# EAGLE board PCB (EAGLE 9.7.0)
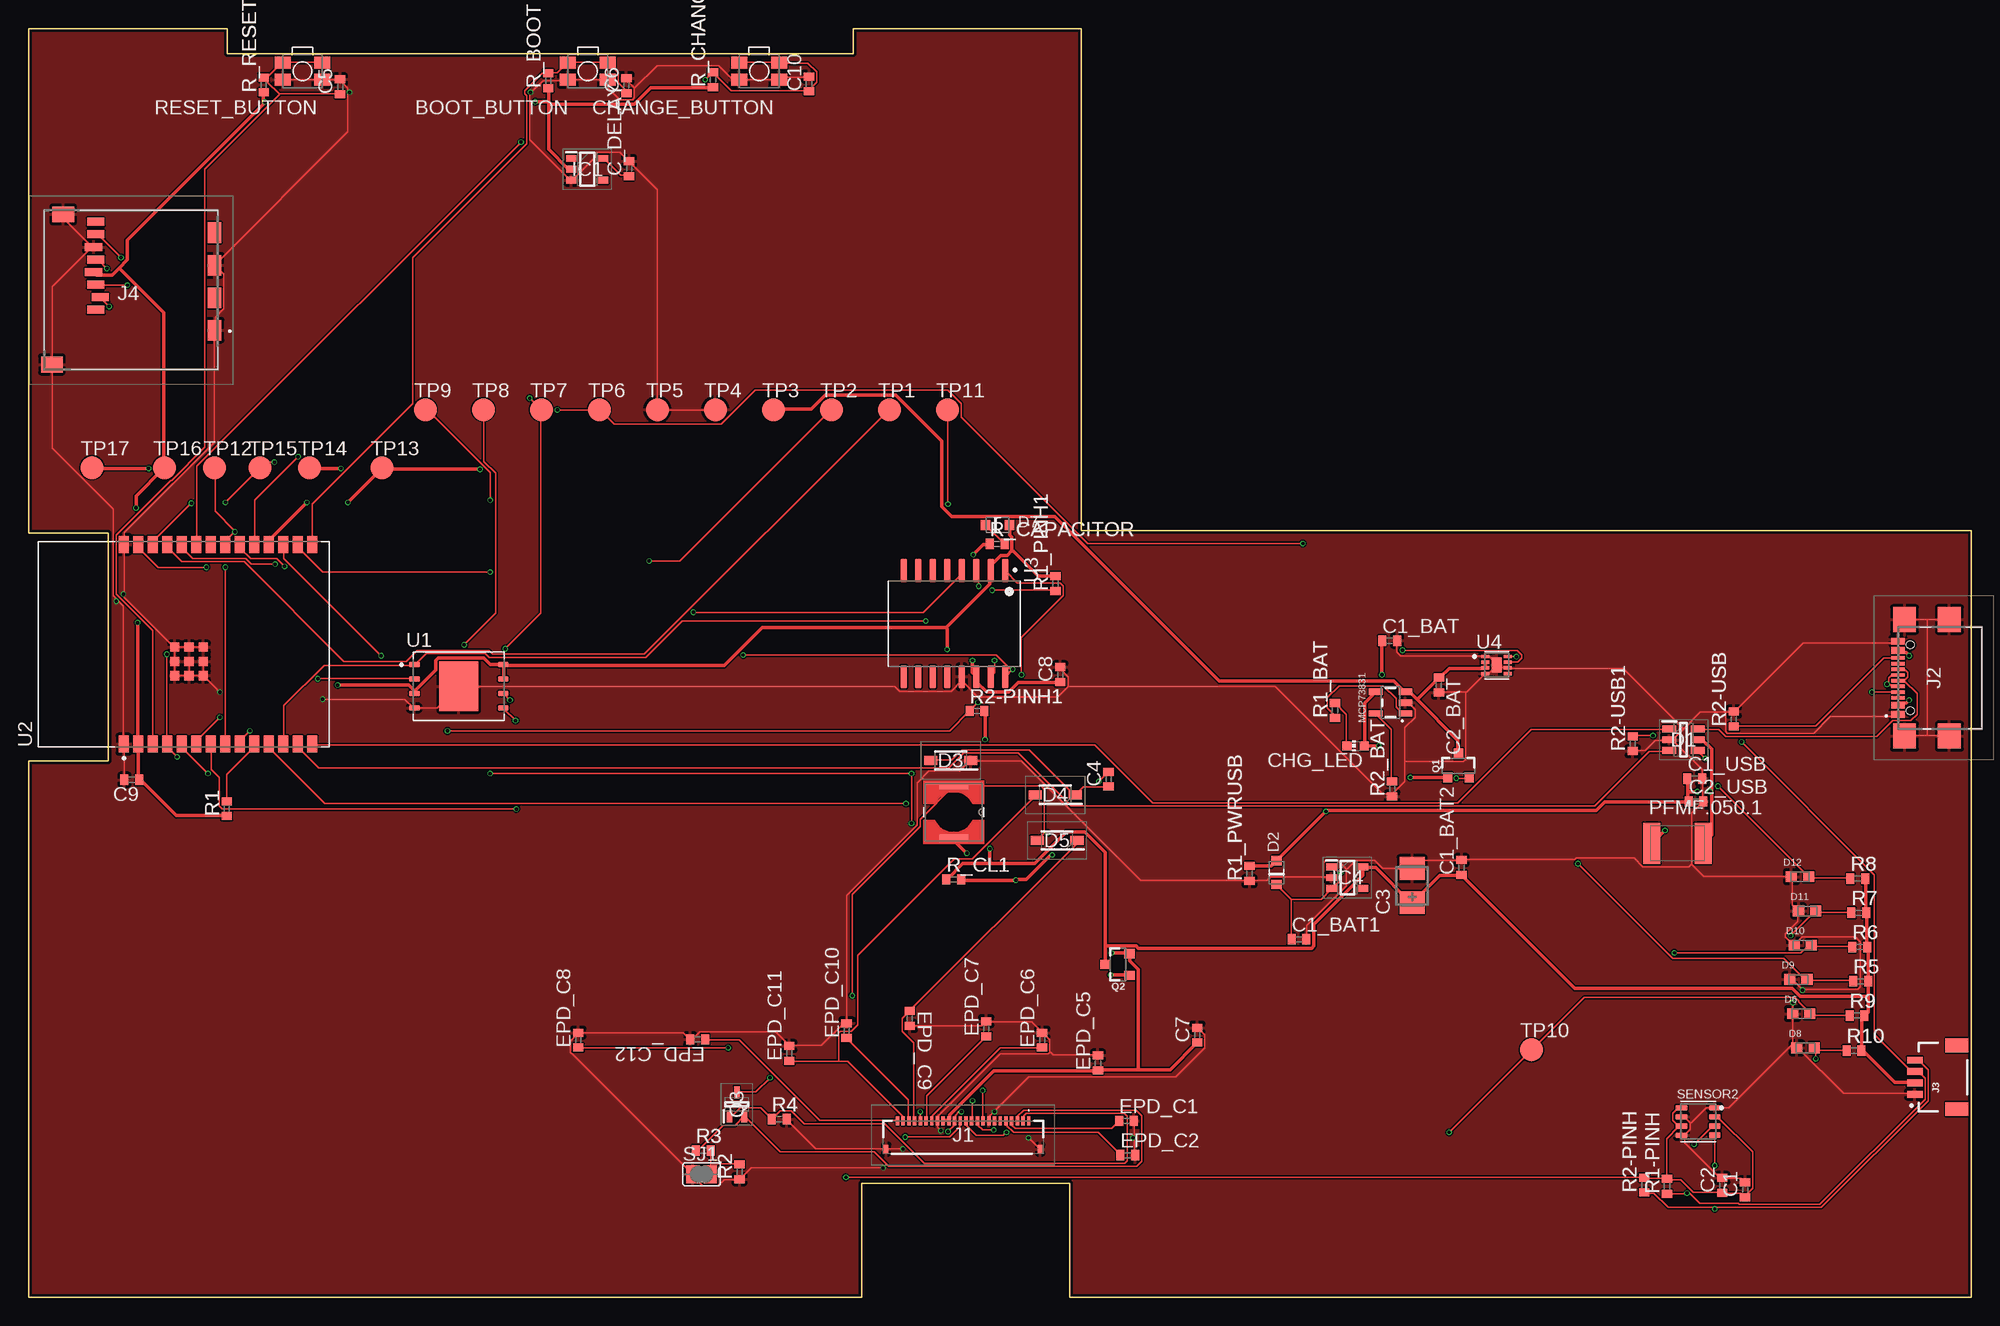
[diagram p0: board, top side]
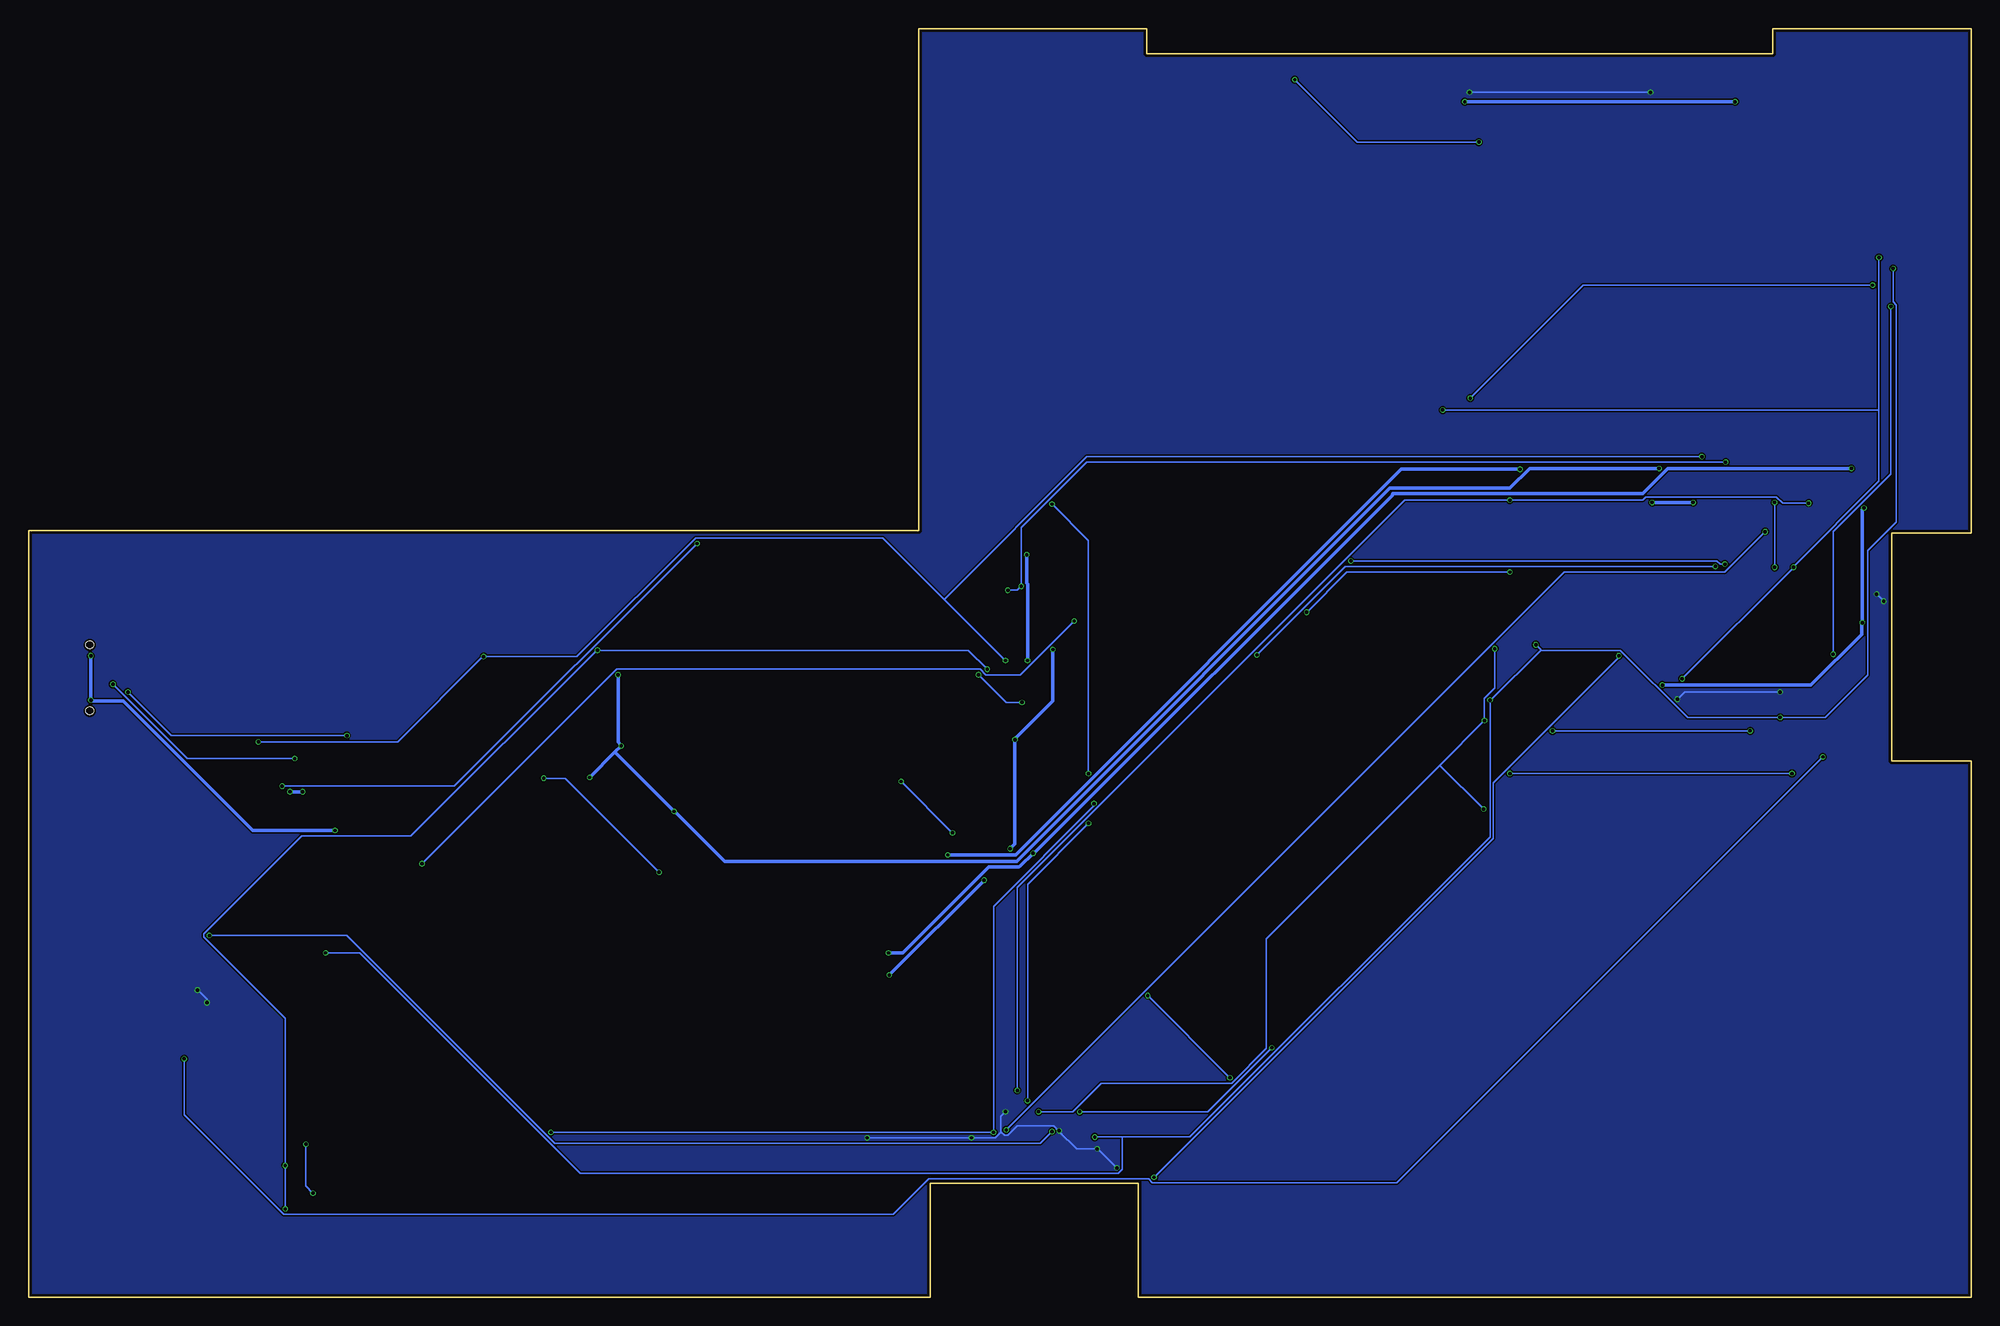
[diagram p1: board, bottom side, seen from below]

Size 170.2 x 111.2 mm. Coordinates in mm from the lower left corner, seen from the top.
Outline: 0,0 0,47 7,47 7,67 0,67 0,111.2 17.4,111.2 17.4,109 72.25,109 72.25,111.2 92.2,111.2 92.2,67.2 170.2,67.2 170.2,0 91.2,0 91.2,10 73,10 73,0 0,0
Copper layers (1*16): Top 0.035mm / dielectric 1.6mm / Bottom 0.035mm
Design rules "jlcpcb-2layers.dru": minimum track width 5mil, minimum drill 0.3mm, track to track 5mil, track to pad 5mil, pad to pad 5mil, via to via 5mil, smd to smd 5mil, copper to edge 0.2mm, drill to drill 6mil, minimum pad ring 10mil, minimum via ring 3mil, stop-mask expansion 4mil, vias tented up to drill 0mil, thermal gap 10mil
Net classes: 0 default: width 0.15 mm; 1 POWER: width 0.3 mm

## Footprints (pad centres in the part's own frame; a part is rotated, then mirrored left to right if it is on the bottom)
MYBUTTON = smd 1.4 x 1.05: 1 1.75,0.75; 2 -1.75,0.75; 3 -1.75,-0.75; 4 1.75,-0.75
ESP32_WROVER_EAGLE-LTSPICE_C0402 = smd 0.7 x 0.9: 1 -0.65,0; 2 0.65,0
RCL_CT3528 = smd 2 x 2.2: + -1.5,0; - 1.5,0
ADAFRUIT_CHIP-LED0603 = smd 0.8 x 0.8: A 0,-0.75; C 0,0.75
SOT95P280X145-6N = smd 1.2 x 0.6: 1 -1.25,0.95; 2 -1.25,0; 3 -1.25,-0.95; 4 1.25,-0.95; 5 1.25,0; 6 1.25,0.95
ESP32_WROVER_AVX---SD0805S020S1R0_AVX_SD0805S020S1R0_0 = smd 0.8 x 0.9: 1 -1.05,0; 2 1.05,0
SOD3716X135N = smd 1.15 x 0.8: 1 -1.75,0; 2 1.75,0
DIOC1608X36N = smd 0.97 x 0.94: 1 -0.75,0; 2 0.75,0
SOT95P280X125-5N = smd 0.9 x 0.6: 1 -1.4,0.95; 2 -1.4,0; 3 -1.4,-0.95; 4 1.4,-0.95; 5 1.4,0.95
SOT95P280X120-5N = smd 0.9 x 0.6: 1 -1.4,0.95; 2 -1.4,0; 3 -1.4,-0.95; 4 1.4,-0.95; 5 1.4,0.95
FH34SRJ24S05SH99 = smd 0.3 x 0.8: 1 5.75,1.45; 2 5.25,1.45; 3 4.75,1.45; 4 4.25,1.45; 5 3.75,1.45; 6 3.25,1.45; 7 2.75,1.45; 8 2.25,1.45; 9 1.75,1.45; 10 1.25,1.45; 11 0.75,1.45; 12 0.25,1.45; 13 -0.25,1.45; 14 -0.75,1.45; 15 -1.25,1.45; 16 -1.75,1.45; 17 -2.25,1.45; 18 -2.75,1.45; 19 -3.25,1.45; 20 -3.75,1.45; 21 -4.25,1.45; 22 -4.75,1.45; 23 -5.25,1.45; 24 -5.75,1.45 | smd 0.4 x 0.8: MP1 6.75,-1.05; MP2 -6.75,-1.05
SAMACSYS_PARTS_USB4110GFA = smd 0.3 x 1.15: A1 -3.35,3.678; A4 -2.55,3.678; A5 -1.25,3.678; A6 -0.25,3.678; A7 0.25,3.678; A8 1.25,3.678; A9 2.55,3.678; A12 3.35,3.678; B1 3.05,3.678; B4 2.25,3.678; B5 1.75,3.678; B6 0.75,3.678; B7 -0.75,3.678; B8 -1.75,3.678; B9 -2.25,3.678; B12 -3.05,3.678 | smd 2.18 x 2: MP1 -5.11,-0.827; MP2 5.11,-0.827; MP3 -5.11,3.103; MP4 5.11,3.103 | hole 0.65: -2.89,2.603; 2.89,2.603
JST04_1MM_RA = smd 0.6 x 1.35: 1 -1.5,0; 2 -0.5,0; 3 0.5,0; 4 1.5,0 | smd 1.2 x 2: NC1 2.8,-3.675; NC2 -2.8,-3.675
112ATAARR03ATTEND = smd 1.8 x 1.2: G1 10.6,10.4; G2 4.9,10.4; S1 7.75,10.4; S2 2.05,10.4 | smd 1.4 x 1.9: G3 13.6,-3.85; G4 0.45,-2.85 | smd 0.7 x 1.5: P1 8.8,0; P2 7.7,0.4; P3 6.6,0; P4 5.5,-0.2; P5 4.4,0; P6 3.3,-0.2; P7 2.2,0; P8 1.1,0
IND_4828-WE-TPC_WRE = smd 0.635 x 2.54: 1 -2.286,0; 2 2.286,0
ESP32_WROVER_SPARKFUN-IC-POWER_SOT23-5 = smd 0.55 x 1.2: 1 -0.95,-1.3; 2 0,-1.3; 3 0.95,-1.3; 4 0.95,1.3; 5 -0.95,1.3
ESP32C6_VARISTOR_CT/CN1812 = smd 1.5 x 3.6: 1 -2.25,0; 2 2.25,0
ESP32_WROVER_SPARKFUN-DISCRETESEMI_SOT23-3 = smd 0.8 x 0.9: 1 -0.95,-1; 2 0.95,-1; 3 0,1.1
SOT65P210X110-3N = smd 1.05 x 0.5: 1 -1.05,0.65; 2 -1.05,-0.65; 3 1.05,0
ESP32_WROVER_EAGLE-LTSPICE_R0402 = smd 0.7 x 0.9: 1 -0.65,0; 2 0.65,0
ESP32_WROVER_BME680_PSON80P300X300X100-8N = smd 1.016 x 0.5: 1 1.458,1.2; 2 1.458,0.4; 3 1.458,-0.4; 4 1.458,-1.2; 5 -1.458,-1.22; 6 -1.458,-0.4; 7 -1.458,0.4; 8 -1.458,1.2
SJ = smd 1.168 x 1.6: 1 -0.762,0; 2 0.762,0
TP20R = smd 2 x 2: TP 0,0
SON127P600X800X80-9N = smd 0.94 x 0.44: 1 -3.895,1.905; 2 -3.895,0.635; 3 -3.895,-0.635; 4 -3.895,-1.905; 5 3.895,-1.905; 6 3.895,-0.635; 7 3.895,0.635; 8 3.895,1.905 | smd 3.4 x 4.3: 9 0,0
XCVR_ESP32-C6-WROOM-1-N8 = smd 1.5 x 0.9: 1 -8.75,5.26; 2 -8.75,3.99; 3 -8.75,2.72; 4 -8.75,1.45; 5 -8.75,0.18; 6 -8.75,-1.09; 7 -8.75,-2.36; 8 -8.75,-3.63; 9 -8.75,-4.9; 10 -8.75,-6.17; 11 -8.75,-7.44; 12 -8.75,-8.71; 13 -8.75,-9.98; 14 -8.75,-11.25; 15 8.75,-11.25; 16 8.75,-9.98; 17 8.75,-8.71; 18 8.75,-7.44; 19 8.75,-6.17; 20 8.75,-4.9; 21 8.75,-3.63; 22 8.75,-2.36; 23 8.75,-1.09; 24 8.75,0.18; 25 8.75,1.45; 26 8.75,2.72; 27 8.75,3.99; 28 8.75,5.26 | smd 0.8 x 0.8: 29_1 -2.755,0.79; 29_2 -1.505,0.79; 29_3 -0.255,0.79; 29_4 -2.755,-0.46; 29_5 -1.505,-0.46; 29_6 -0.255,-0.46; 29_7 -2.755,-1.71; 29_8 -1.505,-1.71; 29_9 -0.255,-1.71
SOIC127P1032X265-16N = smd 2.05 x 0.59: 1 -4.655,4.445; 2 -4.655,3.175; 3 -4.655,1.905; 4 -4.655,0.635; 5 -4.655,-0.635; 6 -4.655,-1.905; 7 -4.655,-3.175; 8 -4.655,-4.445; 9 4.655,-4.445; 10 4.655,-3.175; 11 4.655,-1.905; 12 4.655,-0.635; 13 4.655,0.635; 14 4.655,1.905; 15 4.655,3.175; 16 4.655,4.445
SON50P200X200X80-9N = smd 0.76 x 0.27: 1 -0.985,0.75; 2 -0.985,0.25; 3 -0.985,-0.25; 4 -0.985,-0.75; 5 0.985,-0.75; 6 0.985,-0.25; 7 0.985,0.25; 8 0.985,0.75 | smd 0.9 x 1.3: 9 0,0

## Placement (x,y rotation side)
BOOT_BUTTON  BUTTON_CUSYOMV1  [MYBUTTON]  49,107.45 180 top
C1  100nF  [ESP32_WROVER_EAGLE-LTSPICE_C0402]  150.37,9.44 90 top
C1_BAT  4.7uF  [ESP32_WROVER_EAGLE-LTSPICE_C0402]  119.23,57.55 0 top
C1_BAT1  4.7uF  [ESP32_WROVER_EAGLE-LTSPICE_C0402]  111.29,31.39 0 top
C1_BAT2  4.7uF  [ESP32_WROVER_EAGLE-LTSPICE_C0402]  125.53,37.68 90 top
C1_USB  100nF  [ESP32_WROVER_EAGLE-LTSPICE_C0402]  145.96,45.47 0 top
C2  100nF  [ESP32_WROVER_EAGLE-LTSPICE_C0402]  148.37,9.82 90 top
C2_BAT  4.7uF  [ESP32_WROVER_EAGLE-LTSPICE_C0402]  123.55,53.66 270 top
C2_USB  4.7uF  [ESP32_WROVER_EAGLE-LTSPICE_C0402]  146.07,43.47 0 top
C3  100uF  [RCL_CT3528]  121.2,36.09 90 top
C4  4.7uF/25V  [ESP32_WROVER_EAGLE-LTSPICE_C0402]  94.61,45.41 90 top
C5  1uF  [ESP32_WROVER_EAGLE-LTSPICE_C0402]  27.29,106.09 90 top
C6  100nF  [ESP32_WROVER_EAGLE-LTSPICE_C0402]  52.37,106.2 90 top
C7  10uF  [ESP32_WROVER_EAGLE-LTSPICE_C0402]  102.37,22.99 90 top
C8  100nF  [ESP32_WROVER_EAGLE-LTSPICE_C0402]  90.37,54.58 90 top
C9  100nF  [ESP32_WROVER_EAGLE-LTSPICE_C0402]  9.04,45.37 180 top
C10  100nF  [ESP32_WROVER_EAGLE-LTSPICE_C0402]  68.37,106.34 90 top
C_DELAY  100nF  [ESP32_WROVER_EAGLE-LTSPICE_C0402]  52.61,98.93 90 top
CHANGE_BUTTON  BUTTON_CUSYOMV1  [MYBUTTON]  64,107.45 180 top
CHG_LED  [ADAFRUIT_CHIP-LED0603]  116.25,48.34 90 top
D1  USBLC6-2SC6Y  [SOT95P280X145-6N]  144.98,48.87 0 top
D2  ESP32_WROVER_AVX---SD0805S020S1R0_AVX_SD0805S020S1R0_0_0AVX_SD0805S020S1R0_0_0  [ESP32_WROVER_AVX---SD0805S020S1R0_AVX_SD0805S020S1R0_0]  109.32,37.23 90 top
D3  MBR0530  [SOD3716X135N]  80.78,47.05 180 top
D4  MBR0530  [SOD3716X135N]  89.94,44.05 180 top
D5  MBR0530  [SOD3716X135N]  90.1,40.05 180 top
D6  PGB1010603MR  [DIOC1608X36N]  155.28,24.87 0 top
D7  ESP32_WROVER_AVX---SD0805S020S1R0_AVX_SD0805S020S1R0_0_0AVX_SD0805S020S1R0_0_0  [ESP32_WROVER_AVX---SD0805S020S1R0_AVX_SD0805S020S1R0_0]  84.88,67.68 0 top
D8  PGB1010603MR  [DIOC1608X36N]  155.66,21.87 0 top
D9  PGB1010603MR  [DIOC1608X36N]  155.04,27.87 0 top
D10  PGB1010603MR  [DIOC1608X36N]  155.42,30.87 0 top
D11  PGB1010603MR  [DIOC1608X36N]  155.8,33.87 0 top
D12  PGB1010603MR  [DIOC1608X36N]  155.18,36.87 0 top
EPD_C1  1uF/50V  [ESP32_WROVER_EAGLE-LTSPICE_C0402]  96.18,15.47 0 top
EPD_C2  1uF/50V  [ESP32_WROVER_EAGLE-LTSPICE_C0402]  96.29,12.47 0 top
EPD_C5  1uF/50V  [ESP32_WROVER_EAGLE-LTSPICE_C0402]  93.68,20.55 90 top
EPD_C6  1uF/50V  [ESP32_WROVER_EAGLE-LTSPICE_C0402]  88.79,22.55 90 top
EPD_C7  1uF/50V  [ESP32_WROVER_EAGLE-LTSPICE_C0402]  83.9,23.55 90 top
EPD_C8  1uF/50V  [ESP32_WROVER_EAGLE-LTSPICE_C0402]  48.15,22.55 90 top
EPD_C9  1uF/50V  [ESP32_WROVER_EAGLE-LTSPICE_C0402]  77.2,24.45 270 top
EPD_C10  1uF/50V  [ESP32_WROVER_EAGLE-LTSPICE_C0402]  71.66,23.39 90 top
EPD_C11  1uF/50V  [ESP32_WROVER_EAGLE-LTSPICE_C0402]  66.64,21.39 90 top
EPD_C12  1uF/50V  [ESP32_WROVER_EAGLE-LTSPICE_C0402]  58.61,22.61 180 top
IC1  BD5229G-TR  [SOT95P280X125-5N]  48.95,98.87 0 top
IC4  XC6220A331MR-G  [SOT95P280X120-5N]  115.53,36.79 0 top
J1  FH34SRJ-24S-0.5SH_99_  [FH34SRJ24S05SH99]  81.87,14.04 0 top
J2  SAMACSYS_PARTS_USB4110-GF-A  [SAMACSYS_PARTS_USB4110GFA]  167.44,54.3 90 top
J3  QWIIC_RIGHT_ANGLE  [JST04_1MM_RA]  165.25,19.3 90 top
J4  112A-TAAR-R03_ATTEND  [112ATAARR03ATTEND]  5.89,95.36 270 top
L1  68uH  [IND_4828-WE-TPC_WRE]  81.05,42.53 270 top
MCP73831  ESP32_WROVER_SPARKFUN-IC-POWER_MCP73831  [ESP32_WROVER_SPARKFUN-IC-POWER_SOT23-5]  119.31,52.12 90 top
PFMF.050.1  ESP32C6_VARISTORCN1812  [ESP32C6_VARISTOR_CT/CN1812]  144.44,39.8 0 top
Q1  20V/4.2A/52mΩ/1.4W  [ESP32_WROVER_SPARKFUN-DISCRETESEMI_SOT23-3]  125.26,46.56 0 top
Q2  20V/4.2A/52mΩ/1.4W  [ESP32_WROVER_SPARKFUN-DISCRETESEMI_SOT23-3]  95.44,29.18 90 top
Q3  SI1308EDL-T1-GE3  [SOT65P210X110-3N]  62.05,16.93 90 top
R1  10K  [ESP32_WROVER_EAGLE-LTSPICE_R0402]  17.37,42.83 90 top
R1-PINH  10K  [ESP32_WROVER_EAGLE-LTSPICE_R0402]  143.53,9.74 90 top
R1_BAT  200  [ESP32_WROVER_EAGLE-LTSPICE_R0402]  114.45,51.45 90 top
R1_PINH1  10K  [ESP32_WROVER_EAGLE-LTSPICE_R0402]  89.96,62.56 90 top
R1_PWRUSB  100K  [ESP32_WROVER_EAGLE-LTSPICE_R0402]  106.96,37.15 90 top
R2  2.2  [ESP32_WROVER_EAGLE-LTSPICE_R0402]  62.29,11.01 90 top
R2-PINH  10K  [ESP32_WROVER_EAGLE-LTSPICE_R0402]  141.53,9.85 90 top
R2-PINH1  10K  [ESP32_WROVER_EAGLE-LTSPICE_R0402]  83.09,51.39 0 top
R2-USB  5k1  [ESP32_WROVER_EAGLE-LTSPICE_R0402]  149.37,50.68 90 top
R2-USB1  5k1  [ESP32_WROVER_EAGLE-LTSPICE_R0402]  140.53,48.52 90 top
R2_BAT  2K  [ESP32_WROVER_EAGLE-LTSPICE_R0402]  119.45,44.56 90 top
R3  0.47  [ESP32_WROVER_EAGLE-LTSPICE_R0402]  59.1,12.87 0 top
R4  10K  [ESP32_WROVER_EAGLE-LTSPICE_R0402]  65.75,15.63 0 top
R5  10K  [ESP32_WROVER_EAGLE-LTSPICE_R0402]  160.49,27.71 0 top
R6  10K  [ESP32_WROVER_EAGLE-LTSPICE_R0402]  160.41,30.71 0 top
R7  10K  [ESP32_WROVER_EAGLE-LTSPICE_R0402]  160.33,33.71 0 top
R8  10K  [ESP32_WROVER_EAGLE-LTSPICE_R0402]  160.25,36.71 0 top
R9  10K  [ESP32_WROVER_EAGLE-LTSPICE_R0402]  160.17,24.71 0 top
R10  10K  [ESP32_WROVER_EAGLE-LTSPICE_R0402]  159.91,21.63 0 top
R_BOOT  10K  [ESP32_WROVER_EAGLE-LTSPICE_R0402]  45.53,106.63 90 top
R_CAPACITOR  15  [ESP32_WROVER_EAGLE-LTSPICE_R0402]  84.85,66.04 0 top
R_CHANGE  10K  [ESP32_WROVER_EAGLE-LTSPICE_R0402]  59.96,106.72 90 top
R_CL1  10K  [ESP32_WROVER_EAGLE-LTSPICE_R0402]  81.06,36.63 0 top
R_RESET  10K  [ESP32_WROVER_EAGLE-LTSPICE_R0402]  20.61,106.25 90 top
RESET_BUTTON  BUTTON_CUSYOMV1  [MYBUTTON]  24,107.45 180 top
SENSOR2  ESP32_WROVER_BME680_BME680  [ESP32_WROVER_BME680_PSON80P300X300X100-8N]  146.25,15.42 0 top
SJ1  0  [SJ]  58.96,10.79 0 top
TP1  TPTP20R  [TP20R]  75.41,77.79 0 top
TP2  TPTP20R  [TP20R]  70.33,77.79 0 top
TP3  TPTP20R  [TP20R]  65.25,77.79 0 top
TP4  TPTP20R  [TP20R]  60.17,77.79 0 top
TP5  TPTP20R  [TP20R]  55.09,77.79 0 top
TP6  TPTP20R  [TP20R]  50.01,77.79 0 top
TP7  TPTP20R  [TP20R]  44.93,77.79 0 top
TP8  TPTP20R  [TP20R]  39.85,77.79 0 top
TP9  TPTP20R  [TP20R]  34.77,77.79 0 top
TP10  TPTP20R  [TP20R]  131.66,21.71 0 top
TP11  TPTP20R  [TP20R]  80.49,77.79 0 top
TP12  TPTP20R  [TP20R]  16.31,72.71 0 top
TP13  TPTP20R  [TP20R]  30.96,72.71 0 top
TP14  TPTP20R  [TP20R]  24.61,72.71 0 top
TP15  TPTP20R  [TP20R]  20.26,72.71 0 top
TP16  TPTP20R  [TP20R]  11.91,72.71 0 top
TP17  TPTP20R  [TP20R]  5.56,72.71 0 top
U1  W25Q512JVEIQ  [SON127P600X800X80-9N]  37.69,53.56 0 top
U2  ESP32-C6-WROOM-1-N8  [XCVR_ESP32-C6-WROOM-1-N8]  13.6,57.24 90 top
U3  DS3231SN#  [SOIC127P1032X265-16N]  81.1,59.05 270 top
U4  MAX17048G+T10  [SON50P200X200X80-9N]  128.61,55.42 0 top

## Library data of the parts
BOOT_BUTTON CHANGE_BUTTON CHG_LED PFMF.050.1 RESET_BUTTON SJ1 TP1-TP17 = DeskAssistant v19 v1
C1 C1_BAT C1_BAT1 C1_BAT2 C1_USB C2 C2_BAT C2_USB C4-C10 C_DELAY EPD_C1 EPD_C2 EPD_C5-EPD_C12 = DeskAssistant v19 v1; SPICEMODEL: NONE; SPICEPREFIX: C
C3 = DeskAssistant v19 v1; SPICEPREFIX: C
D1 = DeskAssistant v19 v1; AVAILABILITY: In Stock; CHECK_PRICES: https://www.snapeda.com/parts/USBLC6-2SC6Y/STMicroelectronics/view-part/?ref=eda; DESCRIPTION: 17V Clamp 5A (8/20µs) Ipp Tvs Diode Surface Mount SOT-23-6; MF: STMicroelectronics; MP: USBLC6-2SC6Y; PACKAGE: SOT-23-6 STMicroelectronics; PRICE: None; SNAPEDA_LINK: https://www.snapeda.com/parts/USBLC6-2SC6Y/STMicroelectronics/view-part/?ref=snap
D2 D7 = DeskAssistant v19 v1; CENTROID_NOT_SPECIFIED: No; DATASHEET: http://datasheets.avx.com/schottky.pdf; DIGIKEY_DESCRIPTION: DIODE SCHOTTKY 20V 1A 0805; DIGIKEY_PART_NUMBER: 478-7800-1-ND; LEAD_FREE: yes; MF: AVX; MOUSER_PART_NUMBER: 581-SD0805S020S1R0; PACKAGE: 0805 (2012 metric); PREFIX: D; ROHS: yes; TEMPERATURE_RANGE_HIGH: +125°C; TEMPERATURE_RANGE_LOW: -55°C
D3-D5 = DeskAssistant v19 v1; AVAILABILITY: In Stock; CHECK_PRICES: https://www.snapeda.com/parts/MBR0530/Onsemi/view-part/?ref=eda; DESCRIPTION: Diode Schottky 30 V 500mA Surface Mount SOD-123; MF: ON Semiconductor; MP: MBR0530; PACKAGE: SOD-123-2 ON Semiconductor; PRICE: None; PURCHASE-URL: https://www.snapeda.com/api/url_track_click_mouser/?unipart_id=179458&manufacturer=ON Semiconductor&part_name=MBR0530&search_term=None; SNAPEDA_LINK: https://www.snapeda.com/parts/MBR0530/Onsemi/view-part/?ref=snap
D6 D8-D12 = DeskAssistant v19 v1; AVAILABILITY: In Stock; CHECK_PRICES: https://www.snapeda.com/parts/PGB1010603MR/Littelfuse/view-part/?ref=eda; DESCRIPTION: 150V (Typ) Clamp - Ipp Tvs Diode Surface Mount 0603 (1608 Metric); MF: Littelfuse Inc.; MP: PGB1010603MR; PACKAGE: 0603 Littelfuse Inc.; PRICE: None; PURCHASE-URL: https://www.snapeda.com/api/url_track_click_mouser/?unipart_id=5659453&manufacturer=Littelfuse Inc.&part_name=PGB1010603MR&search_term=None; SNAPEDA_LINK: https://www.snapeda.com/parts/PGB1010603MR/Littelfuse/view-part/?ref=snap
IC1 = DeskAssistant v19 v1; DESCRIPTION: Voltage Detector with Adjustable Delay Time: CMOS processes are utilized to develop high precision, low current consumption CMOS reset ICs that allow arbitrary setting of the delay time. The extensive lineup includes both Nch Open Drain and CMOS output types in a wide range of detection voltages (from 2.3V to 6.0V, in 0.1V steps), enabling selection of the ideal solution based on customer requirements. In addition, the entire series is of course both lead-free and RoHS-compliant.; HEIGHT: 1.25mm; MANUFACTURER_NAME: ROHM Semiconductor; MANUFACTURER_PART_NUMBER: BD5229G-TR; MOUSER_PART_NUMBER: 755-BD5229G-TR; MOUSER_PRICE-STOCK: https://www.mouser.co.uk/ProductDetail/ROHM-Semiconductor/BD5229G-TR?qs=4kLU8WoGk0vvnhrrYwdszw%3D%3D
IC4 = DeskAssistant v19 v1; DESCRIPTION: LDO Voltage Regulators; HEIGHT: 1.2mm; MANUFACTURER_NAME: Torex; MANUFACTURER_PART_NUMBER: XC6220A331MR-G; MOUSER_PART_NUMBER: 865-XC6220A331MR-G; MOUSER_PRICE-STOCK: https://www.mouser.co.uk/ProductDetail/Torex-Semiconductor/XC6220A331MR-G?qs=AsjdqWjXhJ8ZSWznL1J0gg%3D%3D
J1 = DeskAssistant v19 v1; DESCRIPTION: 24 Position FFC, FPC Connector Contacts, Top and Bottom 0.020" (0.50mm) Surface Mount, Right Angle; HEIGHT: 1.1mm; MANUFACTURER_NAME: Hirose; MANUFACTURER_PART_NUMBER: FH34SRJ-24S-0.5SH(99); MOUSER_PART_NUMBER: 798-FH34SRJ24S05SH99; MOUSER_PRICE-STOCK: https://www.mouser.co.uk/ProductDetail/Hirose-Connector/FH34SRJ-24S-0.5SH99?qs=vcbW%252B4%252BSTIpKBl5ap9J8Fw%3D%3D
J2 = DeskAssistant v19 v1; DESCRIPTION: CONN USB 2.0 TYPE-C R/A SMT; HEIGHT: 3.26mm; MANUFACTURER_NAME: GCT (GLOBAL CONNECTOR TECHNOLOGY); MANUFACTURER_PART_NUMBER: USB4110-GF-A; MOUSER_PART_NUMBER: 640-USB4110-GF-A; MOUSER_PRICE-STOCK: https://www.mouser.co.uk/ProductDetail/GCT/USB4110-GF-A?qs=KUoIvG%2F9IlYiZvIXQjyJeA%3D%3D
J3 = DeskAssistant v19 v1; PROD_ID: CONN-13694
J4 = DeskAssistant v19 v1; DESCRIPTION: Micro SD Card Socket, Push-Push Type, Top Mount, SMT, H=1.83mm, 10u; HEIGHT: 1.9mm; MANUFACTURER_NAME: ATTEND; MANUFACTURER_PART_NUMBER: 112A-TAAR-R03 ATTEND
L1 = DeskAssistant v19 v1; COPYRIGHT: Copyright (C) 2024 Ultra Librarian. All rights reserved.; MANUFACTURER_PART_NUMBER: 744043680; MFR_NAME: Wurth Electronics
MCP73831 = DeskAssistant v19 v1; PROD_ID: IC-09995
Q1 Q2 = DeskAssistant v19 v1; PROD_ID: TRAN-14388
Q3 = DeskAssistant v19 v1; AVAILABILITY: In Stock; CHECK_PRICES: https://www.snapeda.com/parts/SI1308EDL-T1-GE3/Vishay+Siliconix/view-part/?ref=eda; DESCRIPTION: Si1308EDL-T1-GE3 N-channel MOSFET Transistor, 1.5 A, 30 V, 3-Pin SC-70 | Siliconix / Vishay SI1308EDL-T1-GE3; MF: Vishay Siliconix; MP: SI1308EDL-T1-GE3; PACKAGE: SOT-323 Vishay Semiconductor; PRICE: None; PURCHASE-URL: https://www.snapeda.com/api/url_track_click_mouser/?unipart_id=274603&manufacturer=Vishay Siliconix&part_name=SI1308EDL-T1-GE3&search_term=None; SNAPEDA_LINK: https://www.snapeda.com/parts/SI1308EDL-T1-GE3/Vishay+Siliconix/view-part/?ref=snap
R1 R1-PINH R1_BAT R1_PINH1 R1_PWRUSB R2 R2-PINH R2-PINH1 R2-USB R2-USB1 R2_BAT R3-R10 R_BOOT R_CAPACITOR R_CHANGE R_CL1 R_RESET = DeskAssistant v19 v1; SPICEMODEL: NONE; SPICEPREFIX: R
SENSOR2 = DeskAssistant v19 v1; AVAILABILITY: Unavailable; DESCRIPTION: Integrated Environmental Unit; MF: Bosch Sensortec; MP: BME680; PACKAGE: LGA-8 Bosch Tools; PRICE: None
U1 = DeskAssistant v19 v1; AVAILABILITY: In Stock; CHECK_PRICES: https://www.snapeda.com/parts/W25Q512JVEIQ/Winbond+Electronics/view-part/?ref=eda; DESCRIPTION: FLASH - NOR Memory IC 512Mb (64M x 8) SPI - Quad I/O 133 MHz 8-WSON (8x6); MF: Winbond Electronics; MP: W25Q512JVEIQ; PACKAGE: Package; PRICE: None; SNAPEDA_LINK: https://www.snapeda.com/parts/W25Q512JVEIQ/Winbond+Electronics/view-part/?ref=snap
U2 = DeskAssistant v19 v1; AVAILABILITY: In Stock; CHECK_PRICES: https://www.snapeda.com/parts/ESP32-C6-WROOM-1-N8/Espressif+Systems/view-part/?ref=eda; DESCRIPTION: Multiprotocol Modules ESP32-C6 module, Wi-Fi 6 in 2.4 GHz band, Bluetooth 5, Zigbee 3.0 and Thread. ESP34-WROOM Compatible - ENGINEERING SAMPLE; MF: Espressif Systems; MP: ESP32-C6-WROOM-1-N8; PACKAGE: None; PRICE: None; SNAPEDA_LINK: https://www.snapeda.com/parts/ESP32-C6-WROOM-1-N8/Espressif+Systems/view-part/?ref=snap
U3 = DeskAssistant v19 v1; AVAILABILITY: In Stock; CHECK_PRICES: https://www.snapeda.com/parts/DS3231SN%23/Analog+Devices/view-part/?ref=eda; DESCRIPTION: Extremely Accurate I²C-Integrated RTC/TCXO/Crystal; MF: Analog Devices; MP: DS3231SN#; PACKAGE: SOIC-16 Maxim; PRICE: None; PURCHASE-URL: https://www.snapeda.com/api/url_track_click_mouser/?unipart_id=99048&manufacturer=Analog Devices&part_name=DS3231SN#&search_term=None; SNAPEDA_LINK: https://www.snapeda.com/parts/DS3231SN%23/Analog+Devices/view-part/?ref=snap
U4 = DeskAssistant v19 v1; AVAILABILITY: In Stock; CHECK_PRICES: https://www.snapeda.com/parts/MAX17048G+T10/Analog+Devices/view-part/?ref=eda; DESCRIPTION: 3µA 1-Cell/2-Cell Fuel Gauge with ModelGauge; MF: Analog Devices; MP: MAX17048G+T10; PACKAGE: TDFN-8 Maxim; PRICE: None; PURCHASE-URL: https://www.snapeda.com/api/url_track_click_mouser/?unipart_id=329239&manufacturer=Analog Devices&part_name=MAX17048G+T10&search_term=None; SNAPEDA_LINK: https://www.snapeda.com/parts/MAX17048G+T10/Analog+Devices/view-part/?ref=snap

## Nets
3V3 [POWER]: C1_BAT2.1 C3.+ C9.1 D7.2 IC1.2 IC4.5 J3.2 J4.P4 Q2.3 R1.1 R1_PINH1.2 R2-PINH1.2 R5.2 R6.2 R7.2 R8.2 R9.2 R10.2 R_BOOT.1 R_CHANGE.1 R_CL1.1 R_RESET.1 TP16.TP U1.3 U1.7 U1.8 U2.2 U3.2
32KHZ: R2-PINH1.1 U2.9 U3.1
DN: D1.4 J2.A7 J2.B7
DP: D1.6 J2.A6 J2.B6
EPD_3V3 [POWER]: C7.1 EPD_C5.1 J1.15 J1.16 L1.2 Q2.2 TP17.TP
EPD_3V3_C [POWER]: Q2.1 R_CL1.2 TP13.TP U2.18
EPD_BUSY: J1.9 TP9.TP U2.26
EPD_CS: D6.2 J1.12 R9.1 TP10.TP U2.11
EPD_DC: J1.11 TP11.TP U2.5
EPD_RST: J1.10 TP12.TP U2.21
FLASH_CS: D9.2 R5.1 U1.1 U2.12
GDR: J1.2 Q3.1 R4.1
GND: BOOT_BUTTON.1 BOOT_BUTTON.2 C1.2 C1_BAT1.2 C1_BAT2.2 C1_BAT.2 C1_USB.2 C2.2 C2_BAT.2 C2_USB.2 C3.- C5.2 C6.2 C7.2 C8.2 C9.2 C10.2 C_DELAY.2 CHANGE_BUTTON.1 CHANGE_BUTTON.2 D1.2 D3.1 D6.1 D8.1 D9.1 D10.1 D11.1 D12.1 EPD_C1.2 EPD_C2.2 EPD_C5.2 EPD_C6.2 EPD_C7.2 EPD_C8.2 EPD_C9.2 EPD_C10.2 EPD_C11.2 EPD_C12.2 IC1.3 IC4.2 J1.8 J1.17 J1.MP1 J1.MP2 J2.A1 J2.A12 J2.B1 J2.B12 J2.MP1 J2.MP2 J2.MP3 J2.MP4 J3.1 J4.G1 J4.G2 J4.G3 J4.G4 J4.P6 MCP73831.2 R1_PWRUSB.1 R2-USB1.1 R2-USB.2 R2.1 R2_BAT.1 R4.2 RESET_BUTTON.1 RESET_BUTTON.2 SENSOR2.1 SENSOR2.5 SENSOR2.7 SJ1.1 TP4.TP TP5.TP U1.4 U1.9 U2.1 U2.28 U2.29_1 U2.29_2 U2.29_3 U2.29_4 U2.29_5 U2.29_6 U2.29_7 U2.29_8 U2.29_9 U3.13 U4.1 U4.4 U4.6 U4.9
GPIO8: R1.2 U2.10
I2C_PW: C1.1 C2.1 R1-PINH.2 R2-PINH.2 SENSOR2.2 SENSOR2.6 SENSOR2.8 U2.17
INT_RTC: R1_PINH1.1 TP15.TP U2.8 U3.3
IO/BOOT: BOOT_BUTTON.3 BOOT_BUTTON.4 C6.1 R_BOOT.2 U2.15
IO/CHANGE: C10.1 CHANGE_BUTTON.3 CHANGE_BUTTON.4 R_CHANGE.2 U2.23
MISO: D12.2 J4.P7 R8.1 TP6.TP U1.2 U2.27
MOSI: D11.2 J1.14 J4.P3 R7.1 TP7.TP U1.5 U2.7
N$1: J2.A5 R2-USB1.2
N$2: J2.B5 R2-USB.1
N$3: C1_BAT1.1 D2.1 IC4.1 IC4.3 Q1.2
N$4: C4.1 D3.2 D4.1
N$5: MCP73831.1 R1_BAT.1
N$6: CHG_LED.C R1_BAT.2
N$7: MCP73831.5 R2_BAT.2
N$8: EPD_C1.1 J1.4
N$9: EPD_C2.1 J1.5
N$10: EPD_C10.1 J1.22
N$11: EPD_C8.1 J1.20
N$12: EPD_C6.1 J1.18
N$13: C_DELAY.1 IC1.5
N$14: EPD_C12.1 J1.24
N$15: D7.1 R_CAPACITOR.2
N$16: EPD_C7.1 J1.19
PREVGH: D5.1 EPD_C9.1 J1.21
PREVGL: D4.2 EPD_C11.1 J1.23
RESE: J1.3 Q3.2 R3.1
RESE': R2.2 R3.2 SJ1.2
RESET: C5.1 R_RESET.2 RESET_BUTTON.3 RESET_BUTTON.4 U2.3
RTC_RST: U2.16 U3.4
RX: TP2.TP U2.24
SCK: D10.2 J1.13 J4.P5 R6.1 TP8.TP U1.6 U2.6
SCL: J3.4 R2-PINH.1 SENSOR2.4 U2.20 U3.16 U4.7
SDA: J3.3 R1-PINH.1 SENSOR2.3 U2.19 U3.15 U4.8
SRC: C4.2 D5.2 L1.1 Q3.3
SS_SD: D8.2 J4.P2 R10.1 U2.4
TX: TP1.TP U2.25
USB_D+: D1.1 U2.14
USB_D-: D1.3 U2.13
VBAT [POWER]: C2_BAT.1 MCP73831.3 Q1.3 TP3.TP U4.2 U4.3
VBUS [POWER]: C1_BAT.1 C1_USB.1 C2_USB.1 CHG_LED.A D1.5 D2.2 MCP73831.4 PFMF.050.1.2 Q1.1 R1_PWRUSB.2 TP14.TP
VRTC [POWER]: C8.1 R_CAPACITOR.1 U3.14
VUSB [POWER]: J2.A4 J2.A9 J2.B4 J2.B9 PFMF.050.1.1

## Tracks (layer width: path | path; a pad name or v marks a point on that pad's centre or on a via)
3V3  (via drill 0.3)
  Top 0.3: 45.57,104.78 45.57,105.95 R_BOOT.1 | 45.57,104.78 45.57,104.57 | 45.57,104.57 45.57,100.62 47.3,98.89 47.51,98.89 IC1.2 | 45.57,104.57 53.05,104.57 54.5,106.02 59.9,106.02 R_CHANGE.1 | R1.1 17.31,42.24 12.95,42.24 9.83,45.36 C9.1 9.63,45.43 9.63,48.48 U2.2 9.56,48.61 v9.56,59.14 | 20.57,104.78 20.57,104.57 8.66,92.66 8.66,90.92 7.93,90.2 | 20.57,104.78 20.57,105.54 R_RESET.1 | 7.93,90.2 7.34,89.61 5.96,89.61 5.75,89.82 J4.P4 | 7.93,90.2 11.84,86.28 11.84,72.71 TP16.TP 11.77,72.57 9.42,70.22 v9.42,69.18 | v44.39,104.78 45.57,104.78 | v20.71,104.78 20.57,104.78 | 33.86,53.18 33.86,52.98 U1.3 | 33.86,53.18 35.66,54.98 35.66,55.82 35.87,56.02 39.89,56.02 40.44,55.47 41.55,55.47 U1.8 | U1.7 41.62,54.22 41.62,55.33 U1.8 | 86.15,65.44 86.15,66.62 85.94,66.83 85.94,67.66 D7.2 | 86.15,65.44 85.73,65.03 85.18,65.03 84.28,64.13 U3.2 84.21,63.57 84.21,62.53 80.4,58.72 | R1_PINH1.2 89.96,63.23 88.43,63.23 86.28,65.37 86.15,65.44 | 80.4,58.72 64.26,58.72 60.94,55.4 41.76,55.4 U1.8 | R8.2 160.94,36.7 160.94,33.79 R7.2 161.01,33.66 161.01,30.75 R6.2 161.15,30.61 161.15,27.77 R5.2 161.15,27.56 161.15,26.38 | J3.2 165.23,18.84 163.5,18.84 160.73,21.61 R10.2 160.59,21.68 160.59,24.45 160.8,24.65 R9.2 160.94,24.79 161.15,25 161.15,26.38 | 84.21,38.02 88.16,38.02 90.92,40.79 92.52,40.79 94.32,38.99 94.32,30.82 | 84.21,38.02 81.85,38.02 80.47,36.63 R_CL1.1 | 94.32,30.82 94.32,29.22 Q2.3 | v83.79,48.89 83.79,51.38 R2-PINH1.2 | 84.21,38.02 v84.21,39.33 | 94.32,30.82 97.02,30.82 97.23,30.61 112.39,30.61 112.6,30.82 112.6,32.69 116.89,36.98 116.89,37.53 IC4.5 116.96,37.67 118,37.67 121.05,34.62 121.19,34.62 C3.+ 121.33,34.69 123.61,36.98 125.48,36.98 C1_BAT2.1 125.62,36.91 135.45,27.08 154.5,27.08 155.19,26.38 161.15,26.38
  Top 0.3: v80.47,56.78 80.47,58.59 80.4,58.72 | v27.08,53.67 33.31,53.67 33.73,53.25 33.86,53.18
  Bottom 0.3: v9.42,69.18 9.56,69.04 v9.56,59.14 9.63,59 9.63,58.1 14.06,53.67 v27.08,53.67 | v20.71,104.78 v44.39,104.78 | v84.21,39.33 83.79,39.75 v83.79,48.89 83.72,49.03 80.47,52.28 v80.47,56.78
32KHZ  (via drill 0.3)
  Top 0.15: v83.17,52.15 82.48,51.45 R2-PINH1.1 82.41,51.38 80.68,49.65 v36.7,49.65 | v86.98,54.57 86.98,57.82 90.65,61.49 90.65,62.33 90.37,62.6 86.63,62.6 85.59,63.64 U3.1 | v19.39,49.65 18.56,48.82 18.56,48.54 U2.9
  Bottom 0.15: v83.17,52.15 84.55,52.15 v86.98,54.57 | v36.7,49.65 v19.39,49.65
DN  (via drill 0.3)
  Top 0.15: 162.94,53.81 163.15,53.6 163.71,53.6 J2.B7 | 162.94,53.81 162.94,54.29 163.15,54.5 163.71,54.5 J2.A7 | v146.88,47.23 146.26,47.85 D1.4 | v162.81,53.74 162.88,53.81 162.94,53.81
  Bottom 0.15: v146.88,47.23 156.3,47.23 v162.81,53.74
DP
  Top 0.15: J2.B6 163.78,54.98 164.4,54.98 164.61,54.78 164.61,54.36 164.33,54.08 163.78,54.08 J2.A6 164.33,54.02 165.44,52.91 165.44,51.11 164.88,50.55 163.29,50.55 161.91,49.17 148.68,49.17 148.06,49.79 146.26,49.79 D1.6
EPD_3V3  (via drill 0.3)
  Top 0.3: J1.16 80.12,15.51 80.61,15.51 J1.15 80.68,15.65 80.68,16 84.55,19.88 93.56,19.88 EPD_C5.1 93.69,19.94 97.23,19.94 | 97.23,19.94 100,19.94 102.35,22.3 C7.1 | 97.23,19.94 97.23,28.74 96.47,29.5 96.47,30.12 Q2.2 96.33,30.19 v94.87,30.19 | v10.53,72.64 5.61,72.64 TP17.TP | v82.2,38.92 81.09,40.03 81.09,40.23 L1.2
  Bottom 0.3: v10.53,72.64 26.59,72.64 28.81,70.43 50.69,70.43 50.76,70.29 82.06,38.99 v82.2,38.92 83.31,37.81 83.45,37.74 86.08,37.74 93.63,30.19 v94.87,30.19
EPD_3V3_C  (via drill 0.3)
  Top 0.3: v24.38,69.67 21.05,66.34 21.05,66 U2.18 | v27.98,69.67 30.95,72.64 TP13.TP 31.09,72.57 v39.54,72.57 | v94.8,28.25 96.4,28.25 Q2.1 | R_CL1.2 81.72,36.56 v86.49,36.56 86.63,36.63 87.39,36.63 89.54,38.78 v89.68,38.78
  Bottom 0.3: v27.98,69.67 v24.38,69.67 | v94.8,28.25 v86.49,36.56 | v39.54,72.57 49.93,72.57 83.72,38.78 v89.68,38.78
EPD_BUSY  (via drill 0.3)
  Top 0.15: v83.58,18.14 83.58,15.51 J1.9 | v40.44,69.87 40.44,72.3 34.97,77.77 34.83,77.77 TP9.TP | v14.27,69.6 10.94,66.27 10.94,66 U2.26
  Bottom 0.15: v83.58,18.14 83.58,35.94 49.65,69.87 v40.44,69.87 28.81,69.87 28.53,70.15 17.11,70.15 16.55,69.6 v14.27,69.6
EPD_CS  (via drill 0.3)
  Top 0.15: R9.1 159.48,24.72 156.23,24.72 156.09,24.86 D6.2 156.02,24.93 155.05,25.9 155.05,25.97 154.7,26.32 136.28,26.32 131.71,21.74 TP10.TP 131.64,21.68 v124.44,14.47 | v85.66,14.47 85.39,14.2 83.03,14.2 82.13,15.1 82.13,15.44 J1.12 | v76.87,43.28 25.97,43.28 21.05,48.2 21.05,48.48 U2.11
  Bottom 0.15: v124.44,14.47 v85.66,14.47 85.66,34.28 76.87,43.07 v76.87,43.28
EPD_DC  (via drill 0.3)
  Top 0.15: v82.68,17.24 82.68,15.51 J1.11 | v77.35,41.55 v77.35,45.91 v40.44,45.91 | v80.54,69.53 80.54,77.77 TP11.TP | v15.72,45.91 13.43,48.2 13.43,48.48 U2.5
  Bottom 0.15: v82.68,17.24 82.68,36.22 v77.35,41.55 | v77.35,45.91 77.35,66.34 v80.54,69.53 | v40.44,45.91 v15.72,45.91
EPD_RST  (via drill 0.3)
  Top 0.15: v84.55,14.68 83.58,14.68 83.17,15.1 83.17,15.44 J1.10 | U2.21 17.24,66 17.24,66.27 v18.07,67.1 18.07,67.17 16.34,68.9 16.34,72.64 TP12.TP
  Bottom 0.15: v84.55,14.68 35.66,63.57 21.61,63.57 v18.07,67.1
FLASH_CS  (via drill 0.3)
  Top 0.15: R5.1 159.83,27.77 155.88,27.77 155.81,27.84 D9.2 155.74,27.91 155.54,27.91 153.74,29.71 144.04,29.71 v135.73,38.02 | U2.12 22.37,48.54 22.37,51.87 25.9,55.4 33.79,55.4 U1.1 33.86,55.47 34.83,56.44 40.03,56.44 40.37,56.09 54.08,56.09 57.27,59.28 v78.6,59.28
  Bottom 0.15: v135.73,38.02 118.69,55.05 86.84,55.05 86.36,54.57 83.31,54.57 v78.6,59.28
GDR
  Top 0.15: J1.2 87.19,15.51 87.19,15.93 87.39,16.14 95.98,16.14 96.26,15.86 96.26,11.98 96.05,11.77 78.46,11.77 75,15.23 67.93,15.23 66.83,16.34 65.86,16.34 65.16,15.65 R4.1 65.09,15.65 64.13,16.62 62.33,16.62 61.63,15.93 61.42,15.93 Q3.1
GND  (via drill 0.3)
  Top 0.15: C9.2 8.38,45.43 8.38,48.48 U2.1 8.31,48.54 8.31,60.59 7.79,61.11 | J4.G4 3.05,94.87 3.05,94.6 5.54,92.1 5.68,92.1 J4.P6 5.54,92.03 2.08,88.57 2.08,81.78 J4.G3 2.08,81.72 2.08,74.44 7.41,69.11 7.41,61.49 7.79,61.11 | TP4.TP 60.11,77.77 55.12,77.77 TP5.TP 55.05,77.84 55.05,97.09 52.63,99.51 C_DELAY.2 52.56,99.58 51.8,100.34 49.79,100.34 49.65,100.2 49.65,99.93 47.71,97.99 47.58,97.99 IC1.3 47.51,97.99 47.37,97.99 43.9,101.45 43.9,105.47 44.01,105.57 | C10.2 68.35,106.92 66,106.92 65.79,106.71 CHANGE_BUTTON.2 65.72,106.71 62.26,106.71 CHANGE_BUTTON.1 62.19,106.71 61.7,106.71 60.45,107.96 55.05,107.96 53.12,106.02 53.05,106.02 | 53.05,106.02 52.42,106.64 52.42,106.78 C6.2 | 53.05,106.02 53.05,105.12 52.91,104.98 51.8,104.98 50.76,106.02 50.76,106.64 BOOT_BUTTON.2 50.69,106.71 47.3,106.71 BOOT_BUTTON.1 47.23,106.64 45.08,106.64 44.01,105.57 | U2.29_3 12.81,56.92 12.81,55.75 U2.29_2 12.81,55.68 12.81,54.5 U2.29_1 12.88,54.5 14.06,54.5 U2.29_4 | U2.29_5 14.06,55.68 14.06,54.57 U2.29_4 | U2.29_3 12.88,56.99 14.06,56.99 U2.29_6 14.13,56.99 15.3,56.99 U2.29_9 | U2.29_7 15.3,54.5 14.13,54.5 U2.29_4 | U2.29_8 15.3,55.68 15.3,54.57 U2.29_7 | 8.38,61.63 8.38,61.35 12.74,56.99 U2.29_3 | 8.38,61.63 8.38,65.93 U2.28 8.38,66 8.38,67.03 16.27,74.93 16.27,84.69 J4.G1 16.34,84.76 16.34,85.87 17.11,86.63 17.11,89.68 16.34,90.44 J4.G2 16.34,90.51 27.98,102.14 27.98,105.61 | RESET_BUTTON.1 22.3,106.71 25.69,106.71 RESET_BUTTON.2 25.76,106.71 27.29,106.71 C5.2 27.29,106.64 27.98,105.95 27.98,105.61 | v43.97,105.61 44.01,105.57 | v28.12,105.61 27.98,105.61
  Top 0.15: v7.69,61.01 7.79,61.11 | v8.31,61.63 8.38,61.63 | EPD_C9.2 77.21,23.82 83.52,23.82 83.86,24.17 EPD_C7.2 83.93,24.17 87.88,24.17 88.78,23.27 EPD_C6.2 88.85,23.2 89.47,22.58 89.47,21.47 | 89.47,21.47 89.33,21.33 85.11,21.33 79.64,15.86 79.64,15.51 J1.17 79.64,15.44 79.64,14.89 v79.92,14.61 | EPD_C5.2 93.63,21.26 89.75,21.26 89.54,21.47 89.47,21.47 | R4.2 66.41,15.58 68.97,13.02 75.07,13.02 J1.MP2 75.14,13.02 v76.59,13.02 | 96.88,13.99 96.88,15.44 EPD_C1.2 | 96.88,13.99 96.88,12.53 EPD_C2.2 | 84.59,16.31 87.6,19.32 100.48,19.32 103.04,21.88 103.04,22.99 102.42,23.61 C7.2 | 84.59,16.31 84.14,15.86 84.14,15.51 J1.8 | v87.6,13.99 88.57,13.02 J1.MP1 | v84.62,16.27 84.59,16.31 | v96.74,13.99 96.88,13.99 | 113.43,36.84 114.12,36.84 IC4.2 | 113.43,36.84 108.79,36.84 108.52,36.56 106.99,36.56 R1_PWRUSB.1 106.92,36.56 97.44,36.56 86.98,47.02 82.55,47.02 D3.1 82.48,47.02 81.58,46.12 78.88,46.12 77.84,45.08 77.84,41.41 71.67,35.25 71.67,24.1 EPD_C10.2 71.61,24.03 71.4,24.03 69.46,22.09 66.69,22.09 EPD_C11.2 66.62,22.09 65.44,23.27 58.79,23.27 58.17,22.64 57.96,22.64 EPD_C12.2 57.89,22.64 57.34,23.2 48.2,23.2 EPD_C8.2 48.13,23.13 47.44,22.44 47.44,21.47 47.58,21.33 47.64,21.33 58.17,10.8 SJ1.1 58.24,10.73 58.24,10.6 59.07,9.76 60.39,9.76 60.94,10.32 62.26,10.32 R2.1 62.33,10.39 63.29,11.36 v74.86,11.36 | 115.44,37.53 115.44,36.08 111.98,32.62 111.98,31.44 C1_BAT1.2 | 115.44,37.53 114.68,38.3 113.64,38.3 113.43,38.09 113.43,36.84 | 115.44,37.53 115.51,37.53 116.27,38.3 117.93,38.3 118.62,37.6 121.19,37.6 C3.- 121.26,37.6 121.95,38.3 125.48,38.3 C1_BAT2.2 125.55,38.36 135.45,38.36 135.59,38.5 140.65,38.5 141.41,37.74 145.43,37.74 145.63,37.95 145.7,37.95
  Top 0.15: 91.06,53.53 91.06,54.36 90.37,55.05 90.37,55.19 C8.2 | 91.06,53.53 90.16,52.63 83.17,52.63 81.78,54.02 81.78,54.36 U3.13 81.72,54.02 80.81,53.12 76.31,53.12 75.9,53.53 37.74,53.53 U1.9 37.67,53.53 35.8,51.66 33.86,51.66 U1.4 33.73,51.66 32.96,52.42 v25.76,52.42 | C1.2 150.34,10.11 150,10.46 148.4,10.46 C2.2 148.33,10.53 148.13,10.53 145.08,13.57 145.08,14.2 SENSOR2.5 144.8,14.27 145.08,14.27 145.56,14.75 145.56,15.3 | 145.56,15.3 145.08,15.79 144.8,15.79 SENSOR2.7 | 145.56,15.3 145.63,15.3 146.95,16.62 SENSOR2.1 148.96,16.62 154.5,22.16 D8.1 | D8.1 154.84,21.88 154.57,22.16 154.57,24.86 D6.1 154.57,24.93 v154.57,25.83 | J3.1 165.23,17.87 159,17.87 154.98,21.88 D8.1 | 120.56,46.95 120.56,49.93 121.47,50.83 121.47,51.52 120.91,52.08 120.63,52.08 MCP73831.2 | 120.56,46.95 120.56,45.22 119.46,44.11 119.46,43.97 R2_BAT.1 119.39,44.11 118.62,44.11 109.21,53.53 91.06,53.53 | U4.9 128.67,55.4 127.97,54.71 127.63,54.71 U4.4 127.56,54.64 125.97,53.05 125.9,53.05 | U4.9 128.67,55.47 127.97,56.16 U4.1 127.56,56.23 120.22,56.23 119.87,56.58 C1_BAT.2 | U4.9 128.74,55.4 128.94,55.19 129.57,55.19 U4.6 129.64,55.12 139.68,55.12 144.97,49.83 | 125.9,53.05 123.61,53.05 C2_BAT.2 | 120.56,46.95 125.69,46.95 125.9,47.16 125.9,53.05 | 166.34,49.24 168.21,49.24 J2.MP1 | 166.34,49.24 164.4,49.24 J2.MP3 | 166.34,59.42 164.4,59.42 J2.MP4 164.33,59.35 163.78,58.79 163.78,57.69 J2.A12 163.78,57.62 163.78,57.41 J2.B1 163.71,57.34 155.47,57.34 149.44,51.31 R2-USB.2 149.3,51.31 148.68,51.31 | 166.34,59.42 168.21,59.42 J2.MP2 | 166.34,59.42 166.34,49.24 | 155.4,27.01 154.57,27.84 154.36,27.84 D9.1
  Top 0.15: 155.4,27.01 160.24,27.01 160.45,27.21 160.45,31.16 160.04,31.58 155.4,31.58 154.7,30.89 D10.1 154.63,30.82 153.87,31.58 153.87,31.86 154.98,32.96 154.98,33.86 D11.1 154.98,33.93 154.5,34.42 154.5,36.84 D12.1 154.43,36.91 146.74,36.91 145.7,37.95 | J2.B12 163.78,51.24 163.78,50.97 J2.A1 163.71,50.9 157.82,50.9 156.37,49.44 148.82,49.44 148.68,49.58 148.68,51.31 | R2-USB1.1 140.58,47.92 141.62,47.92 142.52,48.82 143.69,48.82 D1.2 | 148.68,51.31 146.46,51.31 144.97,49.83 | 144.97,49.83 144.04,48.89 143.76,48.89 D1.2 | D1.2 144.04,48.82 146.6,46.26 146.6,45.5 C1_USB.2 146.67,45.43 146.67,43.49 C2_USB.2 146.67,43.42 145.7,42.45 145.7,37.95 | v155.4,26.94 155.4,27.01 | v16.76,53.05 15.37,54.43 U2.29_7
  Bottom 0.15: v28.12,105.61 v43.97,105.61 | v8.31,61.63 v7.69,61.01 | 85.04,14.47 85.52,13.99 v87.6,13.99 v96.74,13.99 | 85.04,14.47 85.04,15.86 v84.62,16.27 | 79.95,14.58 80.4,15.03 83.58,15.03 84.42,14.2 84.69,14.2 84.97,14.47 85.04,14.47 | 79.95,14.58 78.39,13.02 v76.59,13.02 76.52,13.02 v74.86,11.36 | v79.92,14.61 79.95,14.58 | v154.57,25.83 154.57,26.11 v155.4,26.94 | v16.76,53.05 25.14,53.05 v25.76,52.42
  pour Top: 7.06,46.96 7.04,46.94 7.02,46.92 0.08,46.92 0.08,0.08 72.92,0.08 72.92,10.02 72.94,10.04 72.96,10.06 72.98,10.08 91.22,10.08 91.24,10.06 91.26,10.04 91.28,10.02 91.28,0.08 170.12,0.08 170.12,67.12 92.18,67.12 92.16,67.14 92.14,67.16 92.12,67.18 92.12,111.12 72.33,111.12 72.33,108.98 72.31,108.96 72.29,108.94 72.26,108.92 17.38,108.92 17.35,108.94 17.33,108.96 17.32,108.98 17.32,111.12 0.08,111.12 0.08,67.08 7.02,67.08 7.04,67.06 7.06,67.04 7.08,67.02 7.08,46.98
  pour Bottom: 7.06,46.96 7.04,46.94 7.02,46.92 0.08,46.92 0.08,0.08 72.92,0.08 72.92,10.02 72.94,10.04 72.96,10.06 72.98,10.08 91.22,10.08 91.24,10.06 91.26,10.04 91.28,10.02 91.28,0.08 170.12,0.08 170.12,67.12 92.18,67.12 92.16,67.14 92.14,67.16 92.12,67.18 92.12,111.12 72.33,111.12 72.33,108.98 72.31,108.96 72.29,108.94 72.26,108.92 17.38,108.92 17.35,108.94 17.33,108.96 17.32,108.98 17.32,111.12 0.08,111.12 0.08,67.08 7.02,67.08 7.04,67.06 7.06,67.04 7.08,67.02 7.08,46.98
GPIO8
  Top 0.15: R1.2 17.38,43.49 17.38,45.84 19.74,48.2 19.74,48.48 U2.10
I2C_PW  (via drill 0.3)
  Top 0.15: SENSOR2.2 147.71,15.79 147.99,15.79 151.03,12.74 151.03,9.56 150.34,8.86 C1.1 150.34,8.79 150,9.14 148.4,9.14 C2.1 148.33,9.21 145.84,9.21 144.73,10.32 143.56,10.32 R1-PINH.2 | SENSOR2.8 144.53,16.62 144.04,16.14 144.04,15.51 144.53,15.03 144.73,15.03 SENSOR2.6 144.53,14.96 143.49,13.92 143.49,10.53 R1-PINH.2 | R1-PINH.2 143.49,10.46 141.55,10.46 R2-PINH.2 141.48,10.53 v71.61,10.53 | v30.89,56.23 22.37,64.75 22.37,65.93 U2.17
  Bottom 0.15: v30.89,56.23 30.89,56.09 41.9,45.08 41.9,40.23 v71.61,10.53
INT_RTC  (via drill 0.3)
  Top 0.15: v84.42,61.98 89.96,61.98 R1_PINH1.1 | v83.24,62.33 83.24,63.43 83.03,63.64 U3.3 | v17.24,63.99 17.24,48.54 U2.8 | v17.24,69.67 20.22,72.64 TP15.TP 20.29,72.71 20.77,73.2 v21.54,73.2
  Bottom 0.15: v84.42,61.98 83.58,61.98 v83.24,62.33 83.24,67.45 77.49,73.2 v21.54,73.2 | v17.24,69.67 v17.24,63.99
IO/BOOT
  Top 0.15: C6.1 52.35,105.61 52.35,105.75 51.66,106.44 51.66,107.34 50.76,108.24 BOOT_BUTTON.3 50.69,108.24 47.3,108.24 BOOT_BUTTON.4 47.23,108.24 46.33,107.34 45.57,107.34 R_BOOT.2 45.5,107.27 45.01,107.27 43.49,105.75 43.49,105.47 43.63,105.33 43.63,101.11 33.66,91.13 33.66,78.32 24.86,69.53 24.86,66 U2.15
IO/CHANGE  (via drill 0.3)
  Top 0.15: CHANGE_BUTTON.4 62.26,108.24 65.72,108.24 CHANGE_BUTTON.3 65.79,108.17 68.28,108.17 69.04,107.41 69.04,106.51 68.35,105.81 C10.1 68.35,105.75 61.56,105.75 59.97,107.34 R_CHANGE.2 59.9,107.34 v59.28,106.71 | v43.14,101.24 14.75,72.85 14.75,66 U2.23
  Bottom 0.15: v43.14,101.24 53.81,101.24 v59.28,106.71
MISO  (via drill 0.3)
  Top 0.15: R8.1 159.55,36.77 156.02,36.77 155.95,36.84 D12.2 155.88,36.91 v147.99,44.8 | v25.35,54.22 33.79,54.22 U1.2 | v15.58,63.99 11.36,63.99 9.63,65.72 9.63,65.93 U2.27 | v8.1,91.13 6.09,93.14 5.96,93.14 J4.P7 | v46.33,77.77 50,77.77 TP6.TP 50.07,77.77 51.31,76.52 60.66,76.52 63.64,79.5 80.54,79.5 81.72,78.32 81.72,77.14 92.8,66.06 v111.63,66.06
  Bottom 0.15: v25.35,54.22 v15.58,63.99 15.58,64.06 8.1,71.53 8.1,77.77 | 8.1,77.77 v8.1,91.13 | 8.1,77.77 v46.33,77.77 | v147.99,44.8 132.89,44.8 v111.63,66.06
MOSI  (via drill 0.3)
  Top 0.15: v8.66,88.71 5.96,88.71 J4.P3 | v43.9,78.81 44.87,77.84 TP7.TP 44.87,77.77 44.87,59.97 v41.76,56.85 | R7.1 159.62,33.73 156.71,33.73 156.57,33.86 D11.2 156.5,33.86 v154.36,31.72 | v81.72,16.27 81.51,16.27 81.16,15.93 81.16,15.51 J1.14 81.09,15.44 81.09,15.1 v80.54,14.54 | v42.66,50.55 41.62,51.59 U1.5 | v42.73,42.8 16.97,42.8 16.69,43.07 16.69,45.57 16,46.26 16,48.48 U2.7
  Bottom 0.15: v8.66,88.71 34,88.71 v43.9,78.81 | v81.72,16.27 78.74,16.27 76.24,18.77 64.82,18.77 61.77,21.81 61.77,31.44 46.57,46.64 | 46.57,46.64 v42.66,50.55 42.66,52.49 41.76,53.39 v41.76,56.85 | 46.57,46.64 v42.73,42.8 | v154.36,31.72 142.31,31.72 124.1,13.5 81.58,13.5 v80.54,14.54
N$1  (via drill 0.3)
  Top 0.15: v142.31,49.24 140.58,49.24 R2-USB1.2 | v161.49,53.05 163.71,53.05 J2.A5
  Bottom 0.15: v142.31,49.24 157.68,49.24 v161.49,53.05
N$2
  Top 0.15: R2-USB.1 149.37,50.07 156.57,50.07 162.53,56.02 163.71,56.02 J2.B5
N$3  (via drill 0.3)
  Top 0.15: 110.59,34.9 110.59,31.44 C1_BAT1.1 | 110.59,34.9 109.35,36.15 D2.1 | 114.82,37.19 114.82,36.42 114.68,36.29 114.61,36.29 114.19,35.87 IC4.3 114.12,35.8 113.22,34.9 110.59,34.9 | 114.82,37.19 114.33,37.67 114.19,37.67 IC4.1 | v125.07,45.5 126.17,45.5 Q1.2 | v114.95,37.26 114.89,37.19 114.82,37.19
  Bottom 0.15: v125.07,45.5 123.2,45.5 v114.95,37.26
N$4
  Top 0.15: C4.1 94.6,44.74 92.38,44.74 91.76,44.11 D4.1 91.62,44.04 87.67,47.99 81.78,47.99 80.88,47.09 79.08,47.09 D3.2
N$5
  Top 0.15: R1_BAT.1 114.4,50.83 114.4,51.04 113.78,51.66 113.78,52.56 114.82,53.6 118.69,53.6 119.8,52.49 119.8,51.73 120.36,51.18 120.56,51.18 MCP73831.1
N$6
  Top 0.15: CHG_LED.C 115.44,48.41 115.44,51.11 114.47,52.08 R1_BAT.2
N$7
  Top 0.15: R2_BAT.2 119.39,45.22 119.39,49.79 118.07,51.11 MCP73831.5
N$8
  Top 0.15: J1.4 86.15,15.44 86.15,15.1 86.42,14.82 94.87,14.82 95.5,15.44 EPD_C1.1
N$9
  Top 0.15: J1.5 85.66,15.44 85.66,15.1 86.28,14.47 93.69,14.47 95.63,12.53 EPD_C2.1
N$10
  Top 0.15: J1.22 77.08,15.51 77.08,17.31 71.67,22.71 EPD_C10.1
N$11  (via drill 0.3)
  Top 0.15: v78.11,16.27 78.11,15.51 J1.20 | v61.29,21.88 48.2,21.88 EPD_C8.1
  Bottom 0.15: v78.11,16.27 66.89,16.27 v61.29,21.88
N$12
  Top 0.15: J1.18 79.15,15.51 79.15,15.93 85.11,21.88 88.78,21.88 EPD_C6.1
N$13
  Top 0.15: C_DELAY.1 52.56,98.33 51.87,98.33 50.41,99.79 IC1.5
N$14
  Top 0.15: J1.24 76.11,15.51 69.32,15.51 62.26,22.58 59.28,22.58 EPD_C12.1
N$15
  Top 0.15: D7.1 83.86,67.66 85.45,66.06 R_CAPACITOR.2
N$16
  Top 0.15: J1.19 78.67,15.51 78.67,17.66 83.86,22.85 EPD_C7.1
PREVGH
  Top 0.15: J1.21 77.56,15.51 77.56,22.3 76.52,23.34 76.52,24.45 77.14,25.07 EPD_C9.1 77.21,25.14 91.83,39.75 91.83,40.03 D5.1
PREVGL
  Top 0.15: 70.98,20.71 66.69,20.71 EPD_C11.1 | 70.98,20.71 71.74,20.71 76.59,15.86 76.59,15.51 J1.23 | 70.98,20.71 70.98,23.2 71.12,23.34 72.09,23.34 72.64,23.89 72.64,29.98 81.09,38.43 82.68,38.43 88.16,43.9 88.16,44.04 D4.2
RESE
  Top 0.15: J1.3 86.63,15.51 86.63,15.86 87.19,16.41 97.02,16.41 97.5,15.93 97.5,11.91 97.09,11.49 75.34,11.49 74.1,12.74 65.86,12.74 62.74,15.86 Q3.2 62.67,15.86 61.91,15.1 60.87,15.1 58.66,12.88 58.52,12.88 R3.1
RESE'
  Top 0.15: 59.76,11.7 59.76,10.8 SJ1.2 | 59.76,11.7 59.76,12.81 R3.2 | 59.76,11.7 62.26,11.7 R2.2
RESET
  Top 0.15: 21.95,105.47 27.29,105.47 C5.1 | 21.95,105.47 20.91,106.51 20.91,106.85 R_RESET.2 20.64,106.92 20.91,106.92 22.23,108.24 RESET_BUTTON.4 22.3,108.24 25.69,108.24 RESET_BUTTON.3 | U2.3 10.87,48.54 10.87,58.45 7.69,61.63 7.69,66.83 12.46,71.61 12.53,71.61 15.44,74.51 15.44,98.89 21.95,105.4 21.95,105.47
RTC_RST  (via drill 0.3)
  Top 0.15: v40.44,63.57 25.76,63.57 23.61,65.72 23.61,65.93 U2.16 | v58.24,60.04 78.39,60.04 81.72,63.36 81.72,63.64 U3.4
  Bottom 0.15: v40.44,63.57 54.71,63.57 v58.24,60.04
RX  (via drill 0.3)
  Top 0.15: v21.61,64.26 19.53,64.26 19.04,64.75 14.4,64.75 13.43,65.72 13.43,65.93 U2.24 | v54.36,64.54 57.06,64.54 70.29,77.77 TP2.TP
  Bottom 0.15: v21.61,64.26 22.02,64.26 22.3,64.54 v54.36,64.54
SCK  (via drill 0.3)
  Top 0.15: R6.1 159.76,30.75 156.3,30.75 156.23,30.82 D10.2 156.16,30.82 155.88,30.82 155.26,30.19 v144.18,30.19 | v76.8,14.06 80.68,14.06 81.58,14.96 81.58,15.44 J1.13 | v42.17,52.35 41.62,52.91 U1.6 | v16.76,50.83 14.75,48.82 14.75,48.54 U2.6 | v6.86,90.16 6.09,90.92 5.96,90.92 J4.P5 | v38.16,57.2 40.93,59.97 40.93,72.23 39.89,73.27 39.89,77.77 TP8.TP
  Bottom 0.15: 74.37,14.06 68.49,14.06 42.17,40.37 v42.17,52.35 42.1,52.35 37.74,56.72 | 74.37,14.06 v76.8,14.06 | 37.74,56.72 30.75,56.72 24.86,50.83 v16.76,50.83 12.81,50.83 9.07,54.57 9.07,65.44 6.58,67.93 6.58,86.98 6.86,87.25 v6.86,90.16 | v38.16,57.2 37.74,56.78 37.74,56.72 | v144.18,30.19 141.2,30.19 121.88,10.87 74.72,10.87 74.37,11.22 74.37,14.06
SCL  (via drill 0.3)
  Top 0.15: 147.71,7.89 157.06,7.89 166.41,17.24 166.41,19.94 165.58,20.77 165.3,20.77 J3.4 | 147.71,7.89 143.62,7.89 142.38,9.14 141.55,9.14 R2-PINH.1 | v147.71,11.56 147.71,14.2 SENSOR2.4 | v147.71,7.76 147.71,7.89 | v120.36,56.72 130.4,56.72 130.81,56.3 130.81,56.02 130.47,55.68 129.64,55.68 U4.7 | U3.16 85.59,54.43 v86.22,55.05 86.08,54.98 84.76,56.3 v62.6,56.3 | v22.44,64.06 21.74,64.75 19.46,64.75 18.56,65.65 18.56,65.93 U2.20
  Bottom 0.15: v147.71,7.76 v147.71,11.56 147.71,24.45 154.84,31.58 154.84,31.86 146.26,40.44 136.7,40.44 120.43,56.72 v120.36,56.72 87.88,56.72 v86.22,55.05 | v22.44,64.06 54.85,64.06 v62.6,56.3
SDA  (via drill 0.3)
  Top 0.15: 145.29,9.07 145.56,9.07 146.39,8.24 149.79,8.24 149.86,8.17 156.92,8.17 166.13,17.38 166.13,19.18 165.58,19.74 165.3,19.74 J3.3 165.23,19.88 164.88,19.88 161.7,23.06 161.7,37.05 v150.06,48.68 | 145.29,9.07 143.56,9.07 R1-PINH.1 | v145.91,13.43 147.43,14.96 147.64,14.96 SENSOR2.3 | v145.29,9.14 145.29,9.07 | v130.33,56.16 129.64,56.16 U4.8 | v84.62,55.82 84.62,54.78 84.28,54.43 U3.15 | v23.61,73.68 19.8,69.87 19.8,66 U2.19
  Bottom 0.15: v145.91,13.43 145.91,9.76 v145.29,9.14 | v84.62,55.82 89.99,61.18 | 89.99,61.18 95.36,66.55 111.77,66.55 122.16,56.16 v130.33,56.16 130.4,56.16 137.88,48.68 v150.06,48.68 | v23.61,73.68 77.49,73.68 89.99,61.18
SRC  (via drill 0.3)
  Top 0.15: v93.76,45.22 94.6,46.05 C4.2 | 88.99,40.72 v89.26,40.72 | 88.99,40.72 88.36,40.1 D5.2 | v64.96,19.25 63.71,18 62.12,18 Q3.3 | v72.16,26.45 72.16,35.32 78.11,41.27 78.11,41.9 81.02,44.8 L1.1 81.09,44.8 88.71,44.8 88.99,44.53 88.99,40.72
  Bottom 0.15: v89.26,40.72 v93.76,45.22 | v72.16,26.45 v64.96,19.25
SS_SD  (via drill 0.3)
  Top 0.15: R10.1 159.21,21.68 156.57,21.68 156.44,21.81 D8.2 156.57,21.61 v156.57,20.91 | v12.12,56.37 12.12,48.54 U2.4 12.19,48.48 12.19,48.2 v13.02,47.37 | v7.06,86.84 6.3,87.6 J4.P2
  Bottom 0.15: v12.12,56.37 12.12,67.1 7.06,72.16 v7.06,86.84 | v156.57,20.91 156.57,16 147.85,7.27 94.46,7.27 91.34,10.39 72.09,10.39 71.74,10.04 50.34,10.04 v13.02,47.37
TX
  Top 0.15: U2.25 12.19,65.93 12.19,65.72 13.43,64.47 18.91,64.47 27.63,55.75 33.1,55.75 34.07,56.72 40.3,56.72 40.65,56.37 53.95,56.37 75.34,77.77 TP1.TP
USB_D+
  Top 0.15: D1.1 143.69,49.79 131.64,49.79 125.2,43.35 98.47,43.35 93.42,48.41 24.93,48.41 24.86,48.48 U2.14
USB_D-
  Top 0.15: D1.3 143.69,47.85 141.96,47.85 137.18,43.07 91.34,43.07 86.7,47.71 81.92,47.71 80.61,46.4 25.41,46.4 23.61,48.2 23.61,48.48 U2.13
VBAT
  Top 0.3: U4.2 127.63,55.61 127.63,55.19 U4.3 127.49,55.12 124.44,55.12 123.68,54.36 C2_BAT.1 123.54,54.29 121.64,52.39 | 121.64,52.39 120.98,53.05 120.63,53.05 MCP73831.3 120.5,53.12 119.59,54.02 104.29,54.02 89.89,68.42 80.88,68.42 79.98,69.32 79.98,75.07 75.97,79.08 69.8,79.08 68.56,77.84 65.3,77.84 TP3.TP | 121.64,52.39 125.2,48.82 125.2,47.71 Q1.3
VBUS  (via drill 0.3)
  Top 0.3: 145.36,44.32 145.36,45.43 C1_USB.1 | 145.36,44.32 145.36,43.49 C2_USB.1 145.22,43.42 138.08,43.42 137.32,42.66 113.78,42.66 v113.64,42.59 109.42,38.36 D2.2 109.28,38.23 108.86,37.81 106.99,37.81 R1_PWRUSB.2 | 147.43,44.32 147.43,40.51 146.74,39.82 PFMF.050.1.2 | 147.43,44.32 147.43,48.06 146.67,48.82 146.26,48.82 D1.5 | v146.19,44.32 145.36,44.32 | v147.29,44.32 147.43,44.32 | MCP73831.4 118,53.05 117.03,52.08 117.03,48.41 CHG_LED.A 117.17,48.34 v118.28,48.34 | v121.05,45.57 Q1.1 | v118.56,54.57 118.56,57.55 C1_BAT.1 | v27.35,72.64 24.65,72.64 TP14.TP
  Bottom 0.3: v147.29,44.32 v146.19,44.32 | 118.83,47.78 v118.28,48.34 118.35,48.48 118.56,48.68 v118.56,54.57 | 118.83,47.78 v121.05,45.57 | 118.83,47.78 v113.64,42.59 113.5,42.52 109.21,38.23 83.65,38.23 50.97,70.91 40.44,70.91 38.71,72.64 v27.35,72.64
VRTC  (via drill 0.3)
  Top 0.3: C8.1 90.3,53.88 86.7,53.88 85.87,53.05 83.93,53.05 83.03,53.95 83.03,54.36 U3.14 82.96,54.5 82.68,54.78 v82.68,55.82 | v82.75,65.09 83.65,66 84.14,66 R_CAPACITOR.1
  Bottom 0.3: v82.75,65.09 82.75,62.6 82.68,62.53 v82.68,55.82
VUSB  (via drill 0.3)
  Top 0.3: J2.A4 163.78,51.8 163.78,52.01 J2.B9 163.91,52.08 164.47,52.08 v164.75,52.35 | J2.A9 163.78,56.78 163.78,56.58 J2.B4 163.91,56.51 164.47,56.51 v164.75,56.23 | v143.35,40.93 142.24,39.82 PFMF.050.1.1
  Bottom 0.3: v164.75,56.23 v164.75,52.35 164.61,52.28 161.91,52.28 150.55,40.93 v143.35,40.93